# Altium PCB PCB_Radiance.PcbDoc (part 1 of 2)
Units mil, origin at the board's own origin, x right, y up, seen from the top; angles counter-clockwise.
Board outline 2362.21 x 2362.21 mil, 4 copper layers (Top Layer, GroundPlane, PowerPlane, Bottom Layer), stack 58.4 mil thick; 120 components, 82 nets, 399 pads, 18 vias.
Unrouted connection lines stored in the file: 128.
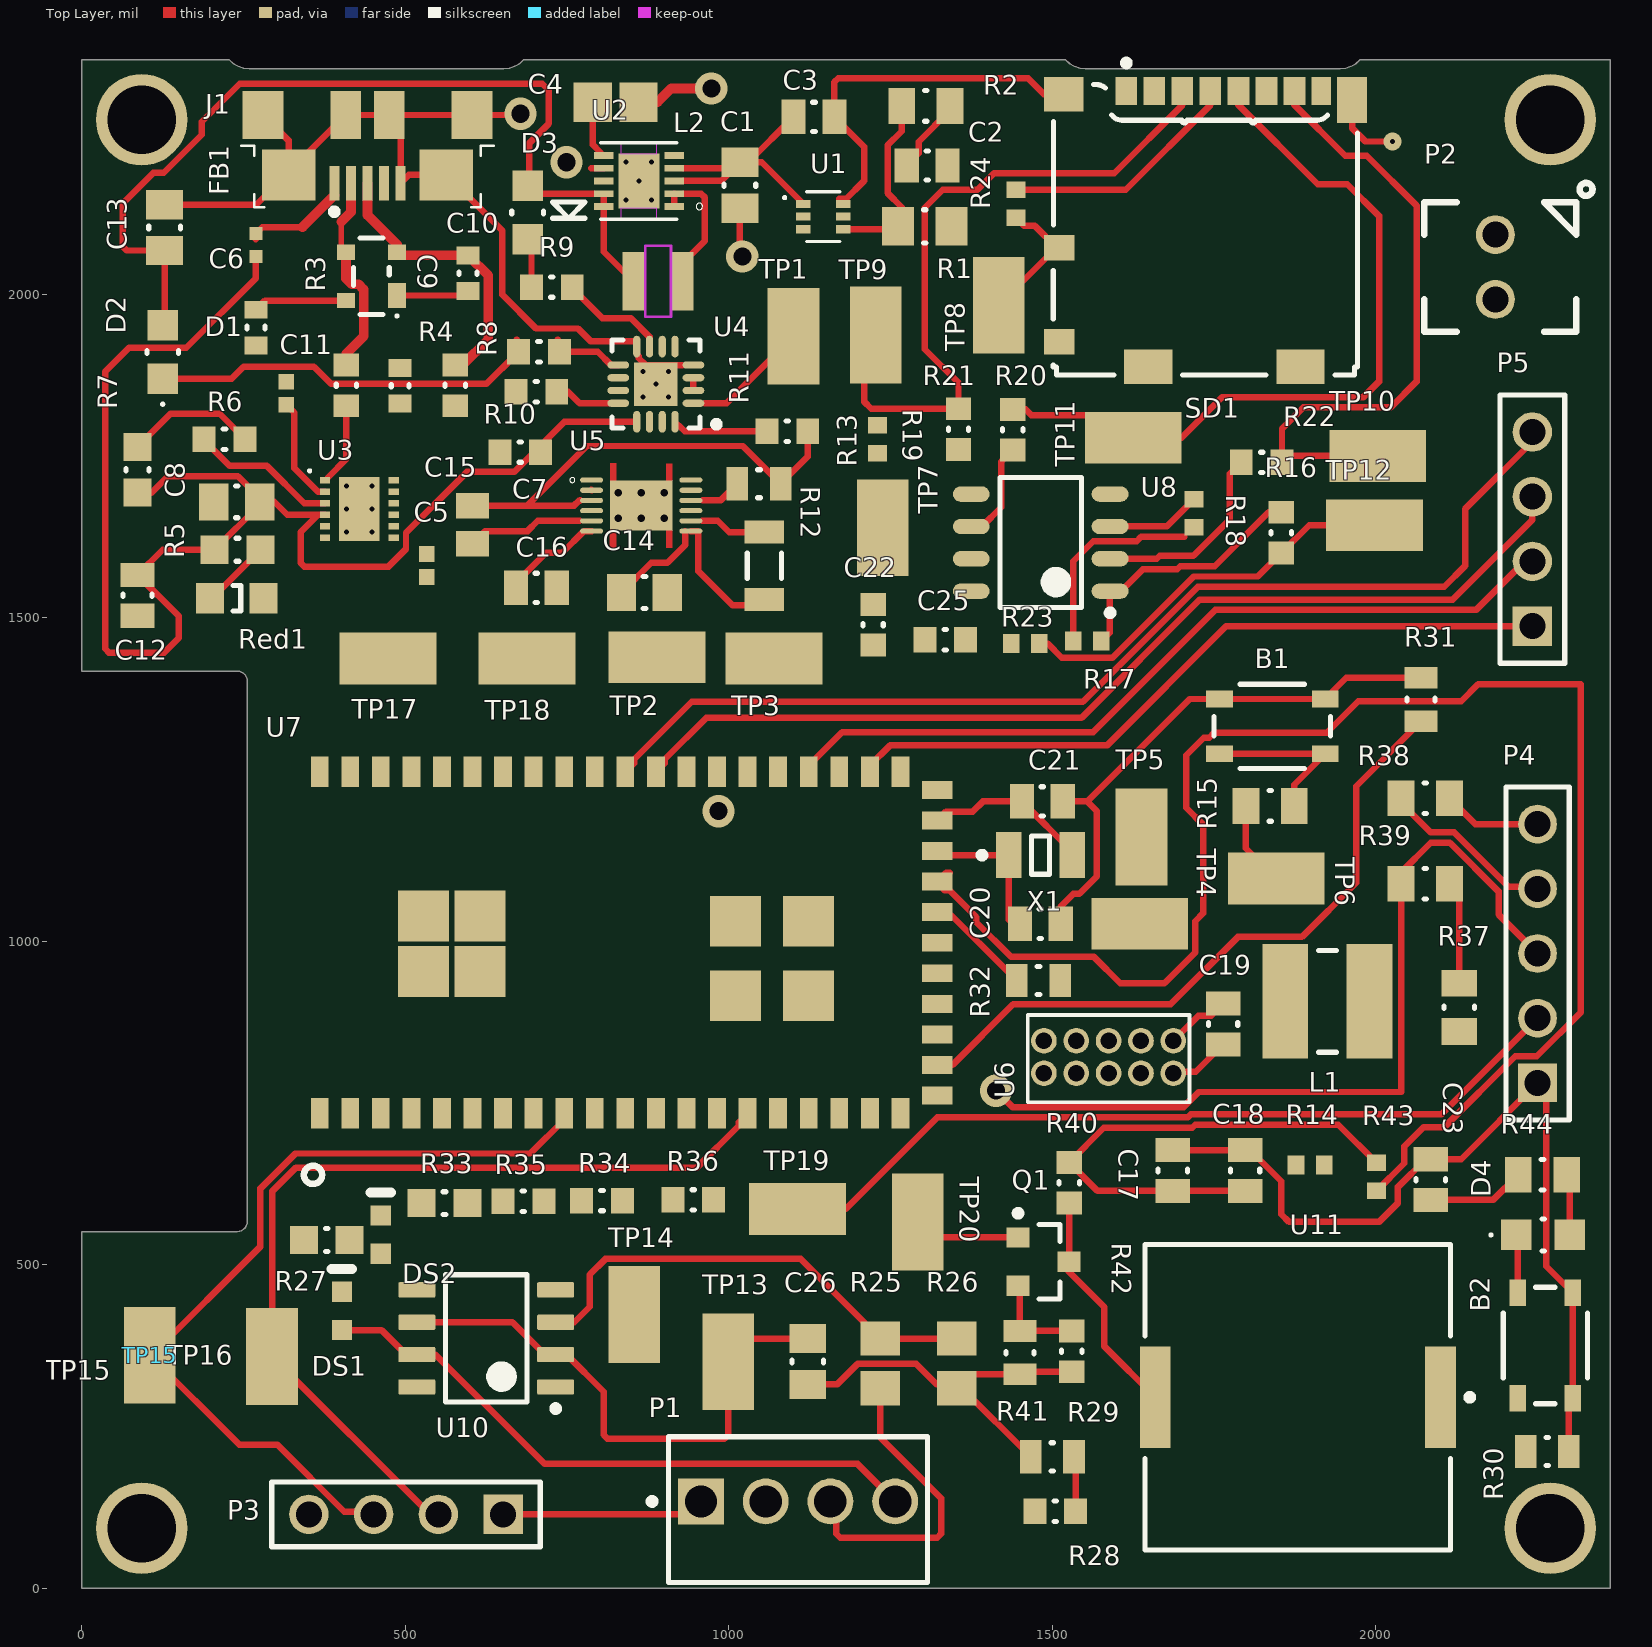
[diagram p0: Top Layer view]
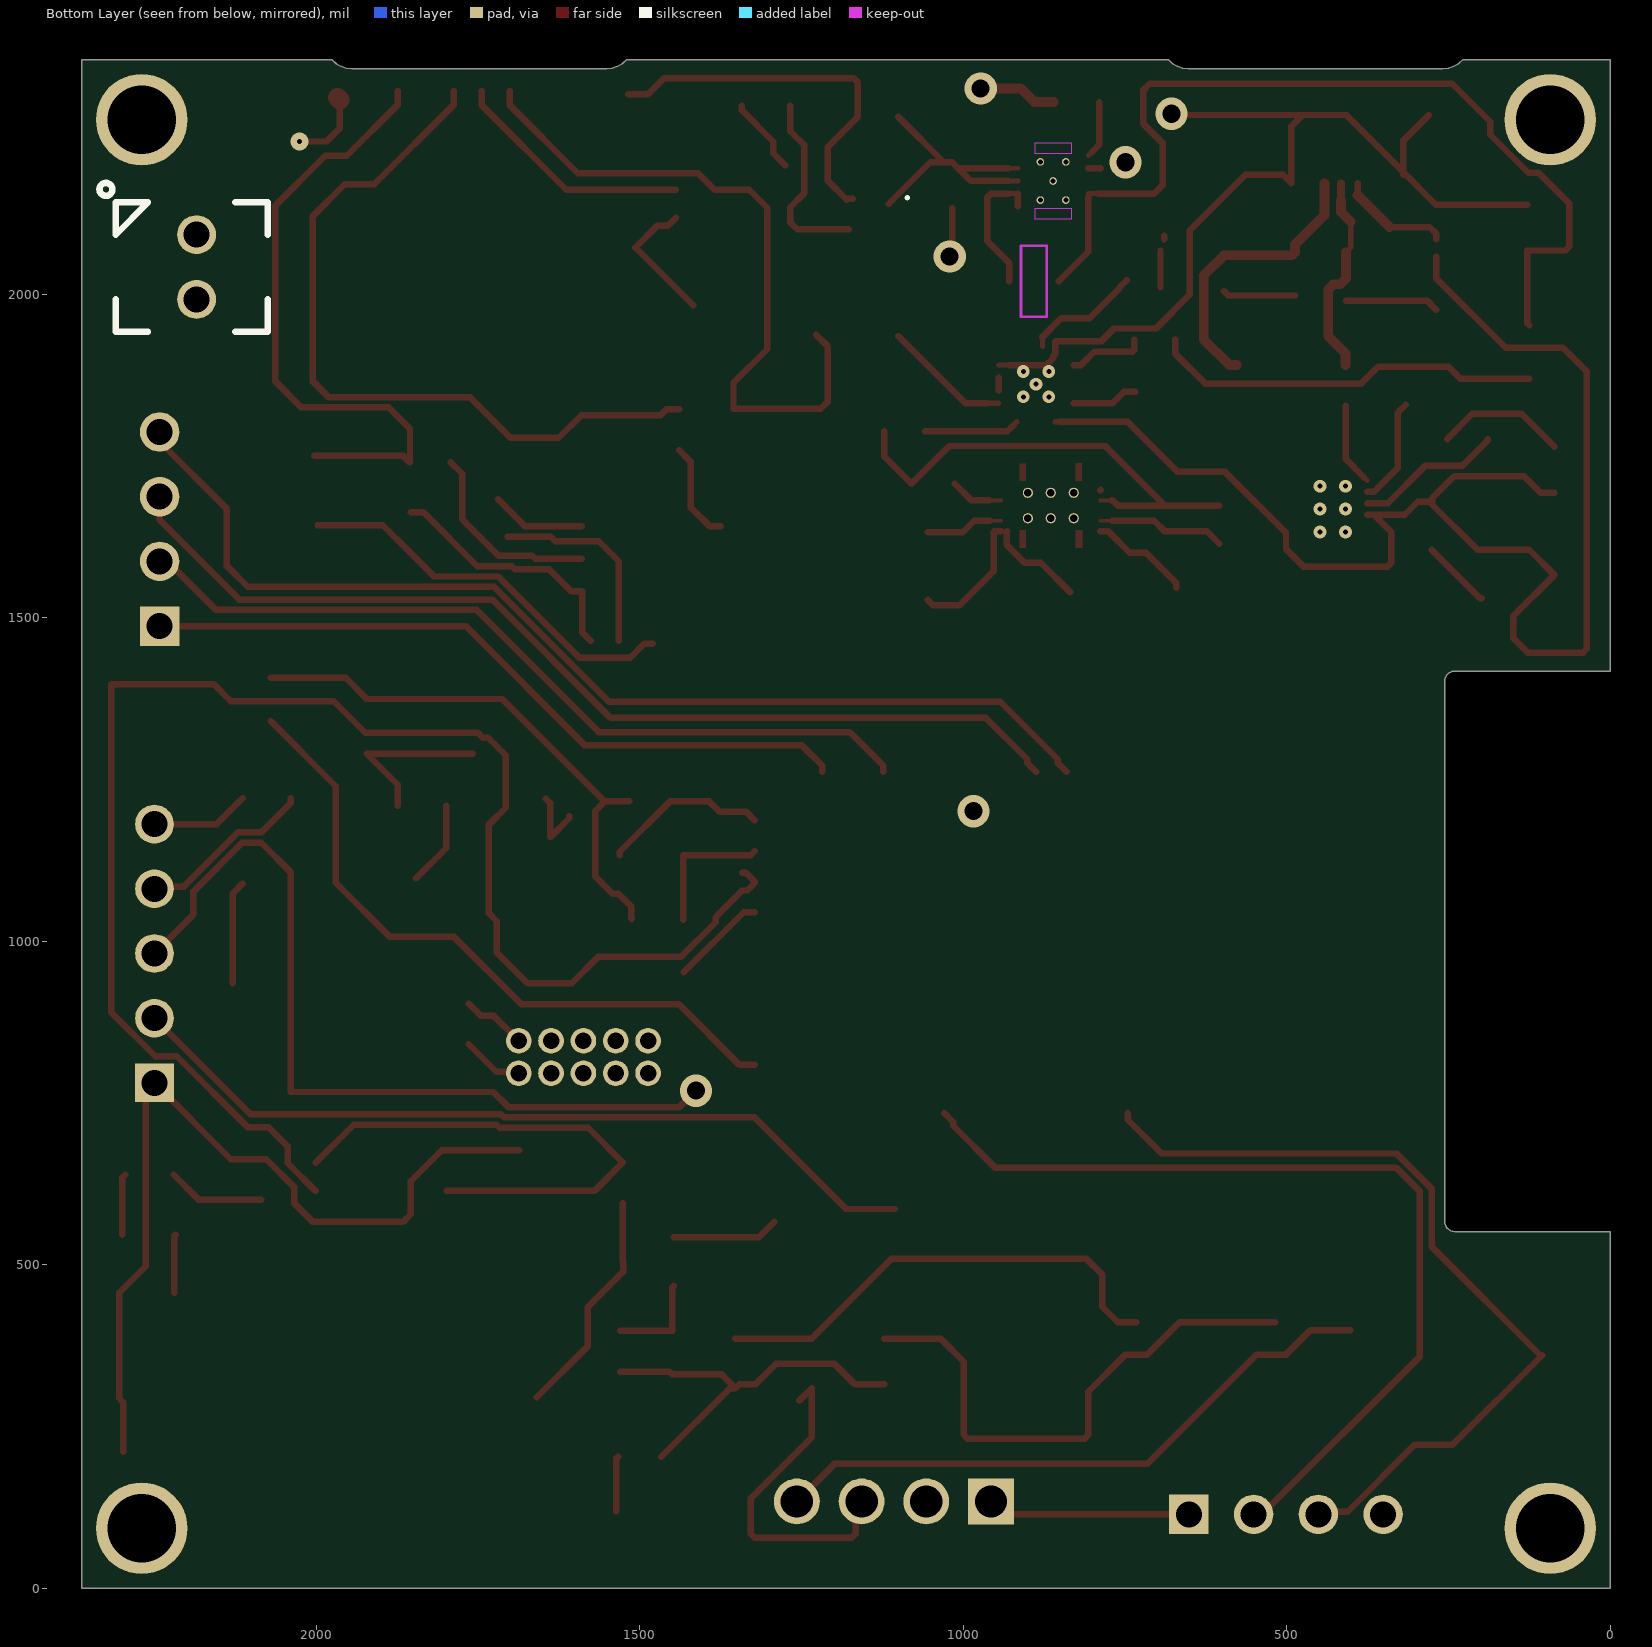
[diagram p1: Bottom Layer view, seen from below]

## Layer stack, top to bottom
Top Solder: solder mask 1, Solder Resist, Dk 3.5
Top Layer: signal copper 1.5
Dielectric1: prepreg 13, PP-006, Dk 4.1
GroundPlane: signal copper 0.7
Dielectric 2: core 28, Core-009, Dk 4.5
PowerPlane: signal copper 0.7
Dielectric 3: prepreg 13, PP-006, Dk 4.1
Bottom Layer: signal copper 1.5
Bottom Solder: solder mask 1, Solder Resist, Dk 3.5

## Board outline
240.16,551.18 0,551.18 0,0 2362.21,0 2362.2,2362.2 1975.39,2362.2 1969.06,2356.37 1961.63,2352.01 1953.45,2349.32 1944.88,2348.42 1551.18,2348.42 1542.62,2349.33 1534.45,2352.01 1527.02,2356.35 1520.67,2362.16 682.72,2362.2 676.38,2356.37 668.95,2352.01 660.77,2349.32 652.2,2348.42 258.5,2348.42 249.95,2349.33 241.77,2352.01 234.34,2356.35 227.99,2362.16 0,2362.2 0,1417.32 240.16,1417.32 243.66,1416.93 246.99,1415.77 249.98,1413.89 252.48,1411.4 254.35,1408.41 255.51,1405.08 255.91,1401.57 255.91,566.93 255.51,563.42 254.35,560.09 252.48,557.1 249.98,554.61 246.99,552.73 243.66,551.57

## Design rules (kind name [scope] priority, off if disabled: settings)
AcuteAngle [All] p1: minimum=6.00000000000000E+0001 checktracksonly=FALSE
AssemblyTestPointUsage [All] p1 off: allowmultiple=TRUE
AssemblyTestpoint [All] p1 off: testpointundercomponent=TRUE minsize=30 maxsize=100 preferedsize=60 minholesize=0 maxholesize=40 preferedholesize=32 testpointgrid=1 usegrid=FALSE gridtolerance=0.01 allowsidebottom=TRUE
BoardOutlineClearance "BoardOutlineClearance_Inner Layer" [OnLayer('Internal Plane 1')OR OnLayer('Internal Plane 2')] p1: gap=20 ignorepadtopadclearanceinfootprint=FALSE
BoardOutlineClearance BoardOutlineClearance_OuterLayers [All] p2: gap=10 ignorepadtopadclearanceinfootprint=FALSE except(20: SMDPad-OutlineEdge SMDPad-CavityEdge SMDPad-CutoutEdge THPad-OutlineEdge THPad-CavityEdge THPad-CutoutEdge)
Clearance [All] p1: gap=6 ignorepadtopadclearanceinfootprint=FALSE except(10: SMDPad-THPad)
DiffPairsRouting [All] p1: maxlimit=10 minlimit=10 mostfreqgap=10 toplayer_minwidth=6 toplayer_maxwidth=15 toplayer_prefwidth=15 midlayer1_minwidth=6 midlayer1_maxwidth=15 midlayer1_prefwidth=15 midlayer2_minwidth=6 midlayer2_maxwidth=15 midlayer2_prefwidth=15 bottomlayer_minwidth=6 bottomlayer_maxwidth=15 bottomlayer_prefwidth=15 maxuncoupledlength=500
FabricationTestPointUsage [All] p1 off: valid=0 allowmultiple=TRUE
FabricationTestpoint [All] p1 off: side=2 testpointundercomponent=TRUE minsize=30 maxsize=100 preferedsize=60 minholesize=0 maxholesize=40 preferedholesize=32 testpointgrid=1 allowsidebottom=TRUE usegrid=FALSE gridtolerance=0.01
HoleSize [All] p1: absolutevalues=TRUE maxlimit=100 minlimit=8 maxpercent=80.000 minpercent=20.000
MinimumAnnularRing [All] p1: minimumring=5
MinimumSolderMaskSliver [All] p1: minsoldermaskwidth=4
PlaneClearance [All] p1: clearance=10
PolygonConnect [All] p1: thpad.connectstyle=Relief thpad.reliefconductorwidth=10 thpad.reliefentries=4 thpad.polygonreliefangle="90 Angle" thpad.airgapwidth=10 smdpad.connectstyle=Relief smdpad.reliefconductorwidth=10 smdpad.reliefentries=4 smdpad.polygonreliefangle="90 Angle" smdpad.airgapwidth=10 via.connectstyle=Direct via.reliefconductorwidth=10 via.reliefentries=4 via.polygonreliefangle="90 Angle" via.airgapwidth=10
RoutingVias [All] p1: holewidth=8 width=20 viastyle="Through Hole" minholewidth=8 minwidth=20 maxholewidth=30 maxwidth=50
SMDNeckDown [All] p1: percent=75.000
SMDToCorner [All] p1: distance=0
SMDToPlane [All] p1: distance=0
SilkToSilkClearance [All] p1: silktosilkclearance=0
SilkToSolderMaskClearance [IsPad] p1: minsilkscreentomaskgap=2 clearancetoexposedcopper=TRUE
SolderMaskExpansion [All] p1: expansion=4
UnRoutedNet [All] p1: checkbadconnections=TRUE
ViasUnderSMD [All] p1: allowed=FALSE
Width [All] p1: maxlimit=1000 minlimit=6 preferedwidth=10
19 further rules are at their usual default settings.

## Classes and differential pairs
differential pair USB_DATA: +USB_DATA_P -USB_DATA_N

## Components (designator, comment, footprint, x,y, rotation, side; value= is the part's Value field where it differs from the comment)
B1 "PTS810 SJK 250 SMTR LFS" "PTS810 SJK 250 SMTR LFS" 1840,1332 r180 top
B2 "PTS810 SJK 250 SMTR LFS" "PTS810 SJK 250 SMTR LFS" 2262,375 r90 top
C1 "4.7uF 16V" CAPC0805(2012)145_N 1017,2168.43 r90 top value=4.7uF
C2 "CAP 22uF" CAPC0805(2012)100_L 1306.5,2199 r0 top value=22uF
C3 "CAP 10uF" CAPC0805(2012)145_L 1131.6,2274 r180 top value=10uF
C4 "120nF" CAPC2013X140X50ML20T25 825,2297 r0 top
C5 "100nF" CAPC0402(1005)60_N 533,1580.72 r90 top
C6 "10nF 16V" CAPC0603(1608)100_L 269,1948.44 r90 top value=10nF
C7 "100nF 16V" CAPC0603(1608)100_N 677.5,1756 r0 top value=100nF
C8 "4.7uF 16V" CAPC0805(2012)145_N 239.43,1679 r0 top value=4.7uF
C9 "47pF 16V" CAPC0603(1608)100_L 492,1858.44 r270 top value=47pF
C10 "47pF 16V" CAPC0603(1608)100_L 597,2032.44 r90 top value=47pF
C11 "100nF" CAPC0402(1005)60_N 316,1847 r270 top
C12 "CAP 1uF 16V 0805(2012)" CAPC0805(2012)100_L 86,1534.5 r90 top value=1uF
C13 "4.7uF 16V" CAPC0805(2012)145_N 128,2103 r270 top value=4.7uF
C14 "4.7uF 16V" CAPC0805(2012)145_N 869.57,1539 r180 top value=4.7uF
C15 "470pf 100V" CAPC2013X70X45LL10T25 604,1643.79 r270 top
C16 "CAP 1uF" CAPC0805(2012)100_L 702.5,1546 r180 top value=1uF
C17 "CAP 10uF 16V" CAPC0805(2012)145_L 1686,645.5 r270 top value=10uF
C18 "CAP 10uF 16V" CAPC0805(2012)145_L 1798,645.5 r270 top value=10uF
C19 "CAP 10uF 16V" CAPC0805(2012)145_L 1764,872 r90 top value=10uF
C20 "CAP 18pF 10V" CAPC0805(2012)75_L 1481.5,1027 r0 top value=18pF
C21 "CAP 18pF 10V" CAPC0805(2012)75_L 1484.5,1216 r0 top value=18pF
C22 "CAP 1uF 16V" CAPC0603(1608)100_N 1223,1489 r90 top value=1uF
C23 "CAP 10uF 16V" CAPC0805(2012)145_L 2085,631.5 r270 top value=10uF
C25 "100nF 16V" CAPC0603(1608)100_N 1334.5,1466 r180 top value=100nF
C26 "4.7uF 16V" CAPC0805(2012)145_N 1122,350.34 r90 top value=4.7uF
D1 "PRTR5V0U2X,215" NXP-SOT143B-4_V 447.63,2027.53 r180 top
D2 "" LTST-C170CKT_V 125,1910.66 r270 top
D3 "" LTST-C170GKT_V 689,2126.32 r270 top
D4 "" LTST-C170CKT_V 2258.66,546 r180 top
DS1 "LTST-C191KGKT" LITE-ON-LTST-C191KRKT-2_V 402,428.47 r90 top
DS2 "LTST-C191KGKT" LITE-ON-LTST-C191KRKT-2_V 462,546.47 r90 top
FB1 "BLM15AG100SN1D" MURA-BLM15-CHIP-2_V 269,2076 r270 top
J1 "ZX62R-B-5P" HIRO-ZX62R-B-5P_V 441.54,2224.34 r180 top
L1 "1uH" BOUR-SDR0403-2_V 1925.04,907 r0 top
L2 "1uH" "SMD 2510" 890.61,2020 r180 top
P1 "640456-4" TECO-640456-4 1107,134 r180 top
P2 "640456-2" 640456-2 2185,2042 r270 top
P3 "" SMTC-MTSW-104-07-X-S-170 651,114 r180 top
P4 "" SMTC-MTLW-105-05-X-S-190 2250,781 r90 top
P5 "" SMTC-MTSW-104-07-X-S-170 2242,1487 r90 top
Q1 "BC846ALT1G" ONSC-SOT-23-3-318-08_V 1486.37,504.6 r0 top
R1 "453K" RESC0805(2012)_M 1302.66,2105 r0 top value="453000.00 Ohm"
R2 "120K" RESC0805(2012)_N 1304.6,2291 r180 top value="120000.00 Ohm"
R3 "27R 1%" RESC0603(1608)_N 409,1859.03 r270 top value="27.00 Ohm"
R4 "27R 1%" RESC0603(1608)_N 577,1859.03 r270 top value="27.00 Ohm"
R5 "1K" RESC0603(1608)_M 240.57,1605 r180 top value="1000.00 Ohm"
R6 "Jumper" RESC0603(1608)_N 220.5,1776 r0 top value="0.00 Ohm"
R7 "1K" RESC0603(1608)_M 86,1728.57 r90 top value="1000.00 Ohm"
R8 "1K02" RESC0603(1608)_N 706.5,1911 r180 top value="1020.00 Ohm"
R9 "1K02" RESC0603(1608)_N 726.5,2011 r180 top value="1020.00 Ohm"
R10 "1K02" RESC0603(1608)_N 702.5,1849 r0 top value="1020.00 Ohm"
R11 "1K02" RESC0603(1608)_N 1090.5,1788 r180 top value="1020.00 Ohm"
R12 "10K2" RESC0805(2012)_L 1046.54,1707 r180 top value="10200.00 Ohm"
R13 "0.01" RESC3216X70X50LL05T20 1055,1580 r270 top
R14 "10K" RESC0402(1005)_M 1898.35,654 r180 top value="10000.00 Ohm"
R15 "39R" RESC0805(2012)_N 1836.6,1209 r0 top value="39.00 Ohm"
R16 "Jumper" RESC0603(1608)_N 1854,1631.5 r90 top value="0.00 Ohm"
R17 "10K" RESC0402(1005)_M 1554,1464 r0 top value="10000.00 Ohm"
R18 "10K" RESC0402(1005)_M 1719,1661.35 r90 top value="10000.00 Ohm"
R19 "10K" RESC0402(1005)_M 1230,1775.65 r90 top value="10000.00 Ohm"
R20 "Jumper" RESC0603(1608)_N 1439,1790.5 r270 top value="0.00 Ohm"
R21 "Jumper" RESC0603(1608)_N 1355,1791.5 r270 top value="0.00 Ohm"
R22 "Jumper" RESC0603(1608)_N 1823.5,1740 r180 top value="0.00 Ohm"
R23 "10K" RESC0402(1005)_M 1458.35,1460 r0 top value="10000.00 Ohm"
R24 "10K" RESC0402(1005)_M 1444,2140 r270 top value="10000.00 Ohm"
R25 "10K" RESC2013X70X40ML20T20 1234,347.39 r270 top
R26 "10K" RESC2013X70X40ML20T20 1352,347.39 r90 top
R27 "1K" RESC0603(1608)_M 378.57,538 r180 top value="1000.00 Ohm"
R28 "Jumper" RESC0603(1608)_N 1504.5,119 r180 top value="0.00 Ohm"
R29 "10K2" RESC0805(2012)_L 1500,203 r0 top value="10200.00 Ohm"
R30 "10K" RESC0805(2012)_L 2265,211 r180 top value="10200.00 Ohm"
R31 "10K" RESC0805(2012)_L 2070,1373.54 r90 top value="10200.00 Ohm"
R32 "10K" RESC0805(2012)_L 1478.54,939 r0 top value="10200.00 Ohm"
R33 "1K" RESC0603(1608)_M 560.43,595 r180 top value="1000.00 Ohm"
R34 "27R" RESC0603(1608)_N 804,599 r180 top value="27.00 Ohm"
R35 "27R" RESC0603(1608)_N 682.5,598 r0 top value="27.00 Ohm"
R36 "27R" RESC0603(1608)_N 945,600 r0 top value="27.00 Ohm"
R37 "5K49" RESC0805(2012)_N 2129,897.6 r270 top value="5490.00 Ohm"
R38 "5K49" RESC0805(2012)_N 2076.4,1221 r180 top value="5490.00 Ohm"
R39 "5K49" RESC0805(2012)_N 2076.4,1089 r180 top value="5490.00 Ohm"
R40 "1K02" RESC0603(1608)_N 1526,626.5 r90 top value="1020.00 Ohm"
R41 "220R" RESC0805(2012)_L 1450,364 r90 top value="220.00 Ohm"
R42 "Jumper" RESC0603(1608)_N 1530,366 r90 top value="0.00 Ohm"
R43 "10K" RESC0402(1005)_M 2001,635.65 r270 top value="10000.00 Ohm"
R44 "39R" RESC0805(2012)_N 2257.6,639 r0 top value="39.00 Ohm"
Red1 "150080SS75000" 0805_A 239.66,1530 r180 top
SD1 "104031-0811" MOLX-104031-0811_V 1737,2101 r180 top
TP1 "5019" KSTN-5019_V 1100,1935 r90 top
TP2 "5019" KSTN-5019_V 889,1439 r0 top
TP3 "5019" KSTN-5019_V 1070,1437 r0 top
TP4 "5019" KSTN-5019_V 1635,1027 r180 top
TP5 "5019" KSTN-5019_V 1638,1161 r90 top
TP6 "5019" KSTN-5019_V 1846,1097 r0 top
TP7 "5019" KSTN-5019_V 1238,1639 r90 top
TP8 "5019" KSTN-5019_V 1417,1983 r90 top
TP9 "5019" KSTN-5019_V 1227,1937 r90 top
TP10 "5019" KSTN-5019_V 2003,1750 r0 top
TP11 "5019" KSTN-5019_V 1625,1778 r180 top
TP12 "5019" KSTN-5019_V 1998,1643 r0 top
TP13 "5019" KSTN-5019_V 999,349.77 r270 top
TP14 "5019" KSTN-5019_V 853.79,423 r270 top
TP15 "5019" KSTN-5019_V 105,360 r90 top
TP16 "5019" KSTN-5019_V 294,358 r90 top
TP17 "5019" KSTN-5019_V 473,1437 r180 top
TP18 "5019" KSTN-5019_V 688,1437 r180 top
TP19 "5019" KSTN-5019_V 1106,586 r180 top
TP20 "5019" KSTN-5019_V 1292,566 r90 top
U1 "TLV626569ADRLR" *SOT50P160X60-6N 1146,2120 r0 top
U2 "TPS61232DRCT" *SON50P300X300X100-10N 861,2175 r180 top
U3 "FT234XD-R" DFN-12_V 428.85,1667.86 r0 top
U4 "BQ24075RGTRG4" RGT16-1700X1700TP 887.25,1861 r180 top
U5 "BQ27441DRZR-G1A" *SON40P400X250X100-13N 864.57,1673.31 r0 top
U6 "20021111-00010T4LF" 20021111-00010T4LF 1587,846 r0 top
U7 "SAMW25H18-MR510PB" SAMW25H18-MR510PB 844.75,997.78 r180 top
U8 "AT25DF081A-SSH-T" AT25DF081A-SSH-T 1482,1616 r180 top
U10 "OPA337UA/2K5" D0008A_N 625,386 r180 top
U11 "PKLCS1212E4001-R1" MURA-PKLCS1212E4001-R1-2_V 1879.53,295 r180 top
X1 "14340272-32.768KHz" ITTI-14340272-32.768KHz-2_V 1481.79,1133 r0 top

## Footprints (in the part's own frame and the unit in brackets; to place one, negate y for a bottom-side part, rotate by r counter-clockwise, add the part's x,y. Pads: shape width x height; smd on the part's side, far side on the other; paste and mask are expansions set on the pad)
0805_A [mm] "Chip LED, 2-Leads, Body 2.0x1.3mm, IPC Medium Density"
  rect 1.1x1.2 smd: 1(-1.05,0) 2(1.05,0)
  silkscreen extent -0.15,-0.5 0.15,0.5, body extent -1,-0.62 1,0.63, height 0.68
640456-2 [mil] "CONN HEADER VERT 2POS .100 TIN"
  round 60 hole 40.16: 1(-50,0) 2(50,0)
  silkscreen extent -130,-110 100,150, body extent -100,-107 100,123, height 395
20021111-00010T4LF [mil] "CONN HEADER 10POS UNSHD VERT T/H"
  round 39.6 hole 25.6: 1(-100,-50) 2(-100,0) 3(-50,-50) 4(-50,0) 5(0,-50) 6(0,0) 7(50,-50) 8(50,0) 9(100,-50) 10(100,0)
  silkscreen extent -125,-95 125,40, body extent -125,-92 125,42, height 217
*SON40P400X250X100-13N [mm]
  oval 0.9x0.2 smd: 1(-1.95,1) 2(-1.95,0.6) 3(-1.95,0.2) 4(-1.95,-0.2) 5(-1.95,-0.6) 6(-1.95,-1) 7(1.95,-1) 8(1.95,-0.6) 9(1.95,-0.2) 10(1.95,0.2) 11(1.95,0.6) 12(1.95,1)
  rect 2.45x1.95 smd: 13(0,0)
  round 0.4 hole 0.3: 14(0.9,0.5) 15(0,0.5) 16(-0.9,0.5) 17(-0.9,-0.5) 18(0,-0.5) 19(0.9,-0.5)
  Top Layer region: -0.978,1.653 -0.978,0.97 -1.225,0.97 -1.225,1.653
  Top Layer region: -0.975,-0.97 -0.975,-1.653 -1.228,-1.653 -1.228,-0.97
  Top Layer region: 1.226,-0.971 1.226,-1.65 0.975,-1.65 0.975,-0.971
  Top Layer region: 1.225,1.65 1.225,0.975 0.975,0.975 0.975,1.65
  silkscreen extent -2.8,0.9 -2.6,1.1
*SON50P300X300X100-10N [mm]
  rect 0.76x0.26 smd: 1(-1.385,1) 2(-1.385,0.5) 3(-1.385,0) 4(-1.385,-0.5) 5(-1.385,-1) 6(1.385,-1) 7(1.385,-0.5) 8(1.385,0) 9(1.385,0.5) 10(1.385,1)
  rect 1.6x2.15 smd: 11(0,0)
  round 0.3 hole 0.2: P$1(0,0) P$2(0.5,0.75) P$3(-0.5,0.75) P$4(-0.5,-0.75) P$5(0.5,-0.75)
  Keep-Out Layer region: -0.705,1.075 0.705,1.075 0.705,1.505 -0.705,1.505
  Keep-Out Layer region: -0.705,-1.505 0.705,-1.505 0.705,-1.075 -0.705,-1.075
  Keep-Out Layer region: -0.705,1.075 0.705,1.075 0.705,1.505 -0.705,1.505
  Keep-Out Layer region: -0.705,-1.505 0.705,-1.505 0.705,-1.075 -0.705,-1.075
  Keep-Out Layer region: -0.705,1.075 0.705,1.075 0.705,1.505 -0.705,1.505
  Keep-Out Layer region: -0.705,-1.505 0.705,-1.505 0.705,-1.075 -0.705,-1.075
  silkscreen extent -2.5,-1.5 1.5,1.5
*SOT50P160X60-6N [mm]
  rect 0.56x0.32 smd: 1(-0.785,0.5) 2(-0.785,0) 3(-0.785,-0.5) 4(0.785,-0.5) 5(0.785,0) 6(0.785,0.5)
  silkscreen extent -1.57,-0.97 0.65,0.97
AT25DF081A-SSH-T [mm] "IC FLASH 8MBIT 100MHZ 8SOIC"
  oval 1.45x0.6 smd: 1(-2.725,1.905) 2(-2.725,0.635) 3(-2.725,-0.635) 4(-2.725,-1.905) 5(2.725,-1.905) 6(2.725,-0.635) 7(2.725,0.635) 8(2.725,1.905)
  silkscreen extent -2.85,-2.55 1.6,2.88, body extent -3,-2.55 3,2.55, height 1.75
BOUR-SDR0403-2_V [mm] "SMD, 2-Leads, Dia 4.5mm, Height 3.5mm"
  rect 1.8x4.5 smd: 1(-1.65,0) 2(1.65,0)
  silkscreen extent -0.35,-2 0.35,2, body extent -2.25,-2 2.25,2, height 3.5
CAPC0402(1005)60_N [mm] "Chip Capacitor, Body 1.0x0.5mm, Height 0.6mm, IPC Medium Density"
  rect 0.62x0.62 smd: 1(-0.45,0) 2(0.45,0)
  body extent -0.55,-0.3 0.55,0.3, height 0.6
CAPC0603(1608)100_L [mm] "Chip Capacitor, Body 1.6x0.8mm, Height 1.0mm, IPC High Density"
  rect 0.7x0.9 smd: 1(-0.7,0) 2(0.7,0)
  silkscreen extent -0.05,-0.35 0.05,0.35, body extent -0.87,-0.47 0.88,0.48, height 1
CAPC0603(1608)100_N [mm] "Chip Capacitor, Body 1.6x0.8mm, Height 1.0mm, IPC Medium Density"
  rect 0.9x1 smd: 1(-0.8,0) 2(0.8,0)
  silkscreen extent -0.05,-0.4 0.05,0.4, body extent -0.87,-0.48 0.88,0.47, height 1
CAPC0805(2012)75_L [mm] "Chip Capacitor, Body 2.0x1.2mm, Height 0.75mm, IPC High Density"
  rect 0.95x1.35 smd: 1(-0.8,0) 2(0.8,0)
  silkscreen extent -0.05,-0.58 0.05,0.58, body extent -1.1,-0.72 1.1,0.72, height 0.75
CAPC0805(2012)100_L [mm] "Chip Capacitor, Body 2.0x1.2mm, Height 1.0mm, IPC High Density"
  rect 0.95x1.35 smd: 1(-0.8,0) 2(0.8,0)
  silkscreen extent -0.05,-0.58 0.05,0.58, body extent -1.1,-0.72 1.1,0.72, height 1
CAPC0805(2012)145_L [mm] "Chip Capacitor, Body 2.0x1.2mm, Height 1.45mm, IPC High Density"
  rect 0.95x1.35 smd: 1(-0.8,0) 2(0.8,0)
  silkscreen extent -0.05,-0.58 0.05,0.58, body extent -1.1,-0.72 1.1,0.72, height 1.45
CAPC0805(2012)145_N [mm] "Chip Capacitor, Body 2.0x1.2mm, Height 1.45mm, IPC Medium Density"
  rect 1.15x1.45 smd: 1(-0.9,0) 2(0.9,0)
  silkscreen extent -0.05,-0.62 0.05,0.63, body extent -1.1,-0.72 1.1,0.73, height 1.45
CAPC2013X70X45LL10T25 [mm] "Chip Capacitor, 2-Leads, Body 2.00x1.25mm, IPC High Density"
  rect 1x1.3 smd: 1(-0.75,0) 2(0.75,0)
  body extent -1.05,-0.67 1.05,0.68, height 0.7
CAPC2013X140X50ML20T25 [mm] "Chip Capacitor, 2-Leads, Body 2.00x1.25mm, IPC Low Density"
  rect 1.5x1.55 smd: 1(-0.9,0) 2(0.9,0)
  body extent -1.1,-0.72 1.1,0.72, height 1.4
D0008A_N [mm] "SOIC, 8-Leads, Body 5x4mm, Pitch 1.27mm, IPC Medium Density"
  rrect17% 1.45x0.6 smd: 1(-2.725,1.905) 2(-2.725,0.635) 3(-2.725,-0.635) 4(-2.725,-1.905) 5(2.725,-1.905) 6(2.725,-0.635) 7(2.725,0.635) 8(2.725,1.905)
  silkscreen extent -2.85,-2.5 1.6,2.88, body extent -3,-2.45 3,2.45, height 1.63
DFN-12_V [mm] "SON, 12-Leads, Body 3x3mm, Pitch 0.45mm, Thermal Pad 2.5x1.6mm"
  rect 0.4x0.25 smd: 1(-1.35,1.125) 2(-1.35,0.675) 3(-1.35,0.225) 4(-1.35,-0.225) 5(-1.35,-0.675) 6(-1.35,-1.125) 7(1.35,-1.125) 8(1.35,-0.675) 9(1.35,-0.225) 10(1.35,0.225) 11(1.35,0.675) 12(1.35,1.125)
  rect 1.6x2.5 smd mask+0.102: 13(0,0)
  silkscreen extent -2,1.45 -1.9,1.55, body extent -1.5,-1.5 1.5,1.5, height 0.9
HIRO-ZX62R-B-5P_V [mm] "USB Micro-B R/A Connector"
  rect 0.4x1.35 smd: 1(1.3,1.338) 2(0.65,1.338) 3(0,1.338) 4(-0.65,1.338) 5(-1.3,1.338)
  rect 2.1x2 smd: 6(-3.1,1.012) 11(3.1,1.012)
  rect 1.6x1.9 smd: 7(-4.1,-1.338) 10(4.1,-1.338)
  rect 1.2x1.9 smd: 8(-0.85,-1.338) 9(0.85,-1.338)
  silkscreen extent -4.95,-0.13 4.95,2.58, body extent -4.4,-3.95 4.4,1.78, height 2.71
ITTI-14340272-32.768KHz-2_V [mm] "Hand Drawn, 2-Leads, Body 3.2x1.5mm, Pitch 2.5mm"
  rect 1x1.8 smd: 1(-1.25,0) 2(1.25,0)
  silkscreen extent -2.42,-0.75 0.35,0.75, body extent -1.6,-0.75 1.6,0.75, height 0.9
KSTN-5019_V [mm] "Test Point, 1-Leads, Body 3.81x2.03mm"
  rect 3.8x2.03 smd: 1(0,0)
  body extent -1.9,-1.01 1.9,1.02, height 2.29
LITE-ON-LTST-C191KRKT-2_V [mm] "Chip, 2-Leads, Body 1.6x0.8mm"
  rect 0.8x0.8 smd: 1(-0.75,0) 2(0.75,0)
  silkscreen extent 1.65,-0.4 1.65,0.4, body extent -0.8,-0.4 0.8,0.4, height 0.55
LTST-C170CKT_V [mm]
  rect 1.2x1.2 smd: A(-1.05,0) C(1.05,0)
  silkscreen extent -0.05,-0.63 2.1,0.63, body extent -1,-0.63 1,0.63, height 1.1
LTST-C170GKT_V [mm] "SMD, 2-Leads, Body 2x1.25mm"
  rect 1.2x1.2 smd: 1(-1.05,0) 2(1.05,0)
  silkscreen extent -0.41,-0.63 0.23,2.25, body extent -1,-0.63 1,0.63, height 1.1
MOLX-104031-0811_V [mm] "Micro SD, 8-Leads, Body 11.95x11.4mm, Pitch 1.1mm"
  rect 0.85x1.1 smd: 1(3.113,-5.412) 2(2.013,-5.412) 3(0.913,-5.412) 4(-0.188,-5.412) 5(-1.288,-5.412) 6(-2.387,-5.412) 7(-3.487,-5.412)
  rect 0.75x1.1 smd: 8(-4.537,-5.412)
  rect 1.2x1 smd: 9(5.748,0.738) 10(5.748,4.438)
  rect 1.55x1.35 smd: 11(5.573,-5.287)
  rect 1.17x1.8 smd: 12(-5.747,-5.062)
  rect 1.9x1.35 smd: 13(-3.722,5.413) 14(2.248,5.413)
  silkscreen extent -5.97,-6.64 5.98,5.74, body extent -5.97,-5.66 5.98,5.74, height 1.45
MURA-BLM15-CHIP-2_V [mm] "Chip Ferrite Bead, 2-Leads, Body 1x0.5mm"
  rect 0.5x0.5 smd: 1(-0.45,0) 2(0.45,0)
  body extent -0.52,-0.28 0.53,0.28, height 0.55
MURA-PKLCS1212E4001-R1-2_V [mm] "SMD, 2-Leads, Body 12x12mm"
  rect 1.2x4 smd: 1(-5.6,0) 2(5.6,0)
  silkscreen extent -6.88,-6 6,6, body extent -6,-6 6,6, height 3
NXP-SOT143B-4_V [mm] "SOT143, 4-Leads, Body 3x1.4mm"
  rect 0.7x1 smd: 1(-1,0.75)
  rect 0.7x0.6 smd: 2(-1,-0.95) 3(1,-0.95) 4(1,0.95)
  silkscreen extent -1.05,-1.5 0.7,1.6, body extent -0.7,-1.5 0.7,1.5, height 1.1
ONSC-SOT-23-3-318-08_V [mm] "SOT23, 3-Leads, Body 2.92x1.3mm, Pitch 0.95mm"
  rect 0.9x0.8 smd: 1(-1,0.95) 2(-1,-0.95) 3(1,0)
  silkscreen extent -1.12,-1.46 0.65,2.02, body extent -0.65,-1.46 0.65,1.46, height 1.11
"PTS810 SJK 250 SMTR LFS" [mm] "SWITCH TACTILE SPST-NO 0.05A 16V"
  rect 1.05x0.65 smd: 1(-2.075,1.075) 2(2.075,1.075) 3(-2.075,-1.075) 4(2.075,-1.075)
  silkscreen extent -2.29,-1.65 2.29,1.65, body extent -2.3,-1.6 2.3,1.6, height 2.5
RESC0402(1005)_M [mm] "Chip Resistor, Body 1.0x0.5mm, IPC Low Density"
  rect 0.65x0.75 smd: 1(-0.55,0) 2(0.55,0)
  body extent -0.52,-0.28 0.53,0.28, height 0.4
RESC0603(1608)_M [mm] "Chip Resistor, Body 1.6x0.8mm, IPC Low Density"
  rect 1.1x1.1 smd: 1(-0.9,0) 2(0.9,0)
  silkscreen extent -0.05,-0.45 0.05,0.45, body extent -0.85,-0.47 0.85,0.47, height 0.6
RESC0603(1608)_N [mm] "Chip Resistor, Body 1.6x0.8mm, IPC Medium Density"
  rect 0.9x1 smd: 1(-0.8,0) 2(0.8,0)
  silkscreen extent -0.05,-0.4 0.05,0.4, body extent -0.85,-0.47 0.85,0.47, height 0.6
RESC0805(2012)_L [mm] "Chip Resistor, Body 2.0x1.3mm, IPC High Density"
  rect 0.85x1.3 smd: 1(-0.85,0) 2(0.85,0)
  silkscreen extent -0.05,-0.55 0.05,0.55, body extent -1.1,-0.67 1.1,0.68, height 0.7
RESC0805(2012)_M [mm] "Chip Resistor, Body 2.0x1.3mm, IPC Low Density"
  rect 1.25x1.5 smd: 1(-1.05,0) 2(1.05,0)
  silkscreen extent -0.05,-0.65 0.05,0.65, body extent -1.1,-0.67 1.1,0.67, height 0.7
RESC0805(2012)_N [mm] "Chip Resistor, Body 2.0x1.3mm, IPC Medium Density"
  rect 1.05x1.4 smd: 1(-0.95,0) 2(0.95,0)
  silkscreen extent -0.05,-0.6 0.05,0.6, body extent -1.1,-0.67 1.1,0.68, height 0.7
RESC2013X70X40ML20T20 [mm] "Chip Resistor, 2-Leads, Body 2.00x1.25mm, IPC Low Density"
  rect 1.35x1.55 smd: 1(-0.975,0) 2(0.975,0)
  body extent -1.1,-0.72 1.1,0.72, height 0.7
RESC3216X70X50LL05T20 [mm] "Chip Resistor, 2-Leads, Body 3.20x1.60mm, IPC High Density"
  rect 0.9x1.55 smd: 1(-1.325,0) 2(1.325,0)
  silkscreen extent -0.5,-0.67 0.5,0.67, body extent -1.63,-0.82 1.62,0.82, height 0.7
RGT16-1700X1700TP [mm] "QFN, 16-Leads, Body 3x3mm, Pitch 0.5mm, Thermal Pad 1.7x1.7mm, TI Recommended"
  oval 0.85x0.28 smd paste-0.025 mask+0.07: 1(-1.475,0.75) 2(-1.475,0.25) 3(-1.475,-0.25) 4(-1.475,-0.75) 9(1.475,-0.75) 10(1.475,-0.25) 11(1.475,0.25) 12(1.475,0.75)
  oval 0.28x0.85 smd paste-0.025 mask+0.07: 5(-0.75,-1.475) 6(-0.25,-1.475) 7(0.25,-1.475) 8(0.75,-1.475) 13(0.75,1.475) 14(0.25,1.475) 15(-0.25,1.475) 16(-0.75,1.475)
  rect 1.7x1.7 smd paste-0.85 mask+0.07: 17(0,0)
  silkscreen extent -2.5,-1.73 1.73,1.73, body extent -1.57,-1.57 1.58,1.58, height 1
SAMW25H18-MR510PB [mm] "RF TXRX MODULE WIFI TRACE ANT"
  rect 2x2 smd: 0(-7.065,-0.839) 0(-7.065,2.085) 0(-4.21,-0.839) 0(-4.21,2.085) 0(5.828,-1.045) 0(5.828,1.137) 0(8.046,-1.045) 0(8.046,1.137)
  rect 0.7x1.2 smd: 1(12.121,6.7) 2(10.921,6.7) 3(9.721,6.7) 4(8.521,6.7) 5(7.321,6.7) 6(6.121,6.7) 7(4.921,6.7) 8(3.721,6.7) 9(2.521,6.7) 10(1.321,6.7) 11(0.121,6.7) 12(-1.079,6.7) 13(-2.279,6.7) 14(-3.479,6.7) 15(-4.679,6.7) 16(-5.879,6.7) 17(-7.079,6.7) 18(-8.279,6.7) 19(-9.479,6.7) 20(-10.679,6.7) 32(-10.679,-6.7) 33(-9.479,-6.7) 34(-8.279,-6.7) 35(-7.079,-6.7) 36(-5.879,-6.7) 37(-4.679,-6.7) 38(-3.479,-6.7) 39(-2.279,-6.7) 40(-1.079,-6.7) 41(0.121,-6.7) 42(1.321,-6.7) 43(2.521,-6.7) 44(3.721,-6.7) 45(4.921,-6.7) 46(6.121,-6.7) 47(7.321,-6.7) 48(8.521,-6.7) 49(9.721,-6.7) 50(10.921,-6.7) 51(12.121,-6.7)
  rect 1.2x0.7 smd: 21(-12.12,6.004) 22(-12.12,4.804) 23(-12.12,3.604) 24(-12.12,2.404) 25(-12.12,1.204) 26(-12.12,0.004) 27(-12.12,-1.196) 28(-12.12,-2.396) 29(-12.12,-3.596) 30(-12.12,-4.796) 31(-12.12,-5.996)
  silkscreen extent 12.02,8.76 12.74,9.48, body extent -12.89,-7.45 20.98,7.46, height 3.37
"SMD 2510" [mm] "Chip Inductor, 2-Leads, Body 2.5x2.0mm, IPC Medium Density"
  rect 0.85x2.3 smd: 1(-0.975,0) 2(0.975,0)
  Keep-Out Layer lines w0.1: 0.508,1.397 0.508,-1.397 -0.508,-1.397 -0.508,1.397 0.508,1.397
  body extent -1.25,-1 1.25,1, height 1
SMTC-MTLW-105-05-X-S-190 [mm] "Terminal Assembly, 1x5 Pins, Vertical, 2.54mm Pitch, Male"
  rect 1.52x1.52 hole 1.02: 1(0,0)
  round 1.52 hole 1.02: 2(2.54,0) 3(5.08,0) 4(7.62,0) 5(10.16,0)
  silkscreen extent -1.46,-1.24 11.62,1.24, body extent -1.27,-1.24 11.43,1.24, height 6.35
SMTC-MTSW-104-07-X-S-170 [mm] "Assembly .025\" [.64] SQ Post Terminal Strip, 1x4 Pins, Vertical, 2.54mm Pitch, Male"
  rect 1.55x1.55 hole 1.02: 1(0,0)
  round 1.55 hole 1.02: 2(2.54,0) 3(5.08,0) 4(7.62,0)
  silkscreen extent -1.46,-1.27 9.08,1.27, body extent -1.27,-1.27 8.89,1.27, height 6.86
TECO-640456-4 [mm] "Through Hole, 4-Leads, Body 10.16x5.72mm, Pitch 2.54mm"
  rect 1.8x1.8 hole 1.27 paste+0: 1(3.81,0)
  round 1.8 hole 1.27 paste+0: 2(1.27,0) 3(-1.27,0) 4(-3.81,0)
  silkscreen extent -5.08,-2.54 5.86,3.18, body extent -5.08,-2.54 5.08,3.18, height 10.03

## Part data
B1 B2: "SWITCH TACTILE SPST-NO 0.05A 16V Tactile Switch SPST-NO Top Actuated Surface Mount", Color=White, Current Rating="50 mA", Manufacturer="ITT /  C&K Components", Manufacturer Part Number=PTS810SJK250SMTRLFS, Operating Force="2.6 N", Operating Temperature Range="- 40 C to + 85 C", Supplier Part Number 1=CKN10503CT-ND, Voltage Rating DC="16 VDC", Actuator=Oval, Brand="C&K Components", ComponentLink1Description=https://datasheet.ciiva.com/18514/pts810-4mar13-18514061.pdf, ComponentLink1URL=https://datasheet.ciiva.com/18514/pts810-4mar13-18514061.pdf, ComponentLink2Description=https://datasheet.ciiva.com/18514/pts810-4mar13-18514062.pdf, ComponentLink2URL=https://datasheet.ciiva.com/18514/pts810-4mar13-18514062.pdf, ComponentLink3Description=https://datasheet.ciiva.com/18514/pts810-4mar13-18514063.pdf, ComponentLink3URL=https://datasheet.ciiva.com/18514/pts810-4mar13-18514063.pdf, Contact Form=SPST, Contact Plating=Silver, Factory Pack Quantity=2900, Mounting Direction=Straight, Mounting Style=SMD/SMT, Packaging=Reel, Part # Aliases=Y97LT25B5DBFP, Product Category="Tactile Switches", RoHS=Details, Series=PTS810, Stem Height="2.5 mm", Supplier 1=Digi-Key, Switch Function="OFF - (ON)", Termination Style="J Form Lead", Travel="0.15 mm"
C1 C8 C13 C14 C26: library part CMP-1036-04889-1, "CAP 4.7uF 16V ±10% 0805 (2012 Metric) Thickness 1.45mm SMD", Case-EIA=0805, Case-Metric=2012, Rated Voltage="16 V", Tolerance=±10%, Max Thickness="1.45 mm", Technology=SMT
C2: library part CMP-1036-04944-1, "CAP 22uF 10V ±20% 0805 (2012 Metric) Thickness 1mm SMD", Case-EIA=0805, Case-Metric=2012, Rated Voltage="10 V", Tolerance=±20%, Max Thickness="1 mm", Technology=SMT
C3 C17 C18 C19 C23: library part CMP-1036-04927-1, "CAP 10uF 16V ±10% 0805 (2012 Metric) Thickness 1.45mm SMD", Case-EIA=0805, Case-Metric=2012, Rated Voltage="16 V", Tolerance=±10%, Max Thickness="1.45 mm", Technology=SMT
C4: library part CMP-2007-04709-1, Manufacturer="AVX Interconnect / Elco", Part Number=08055C124KAT2A
C5 C11: library part CMP-1034-02062-1, "CAP 100nF 6.3V ±20% 0402 (1005 Metric) Thickness 0.6mm SMD", Case-EIA=0402, Case-Metric=1005, Rated Voltage="6.3 V", Tolerance=±20%, Max Thickness="0.6 mm", Technology=SMT
C6: library part CMP-1035-02311-1, "CAP 10nF 16V ±10% 0603 (1608 Metric) Thickness 1mm SMD", Case-EIA=0603, Case-Metric=1608, Rated Voltage="16 V", Tolerance=±10%, Max Thickness="1 mm", Technology=SMT
C7 C25: library part CMP-1035-02584-1, "CAP 100nF 16V ±10% 0603 (1608 Metric) Thickness 1mm SMD", Case-EIA=0603, Case-Metric=1608, Rated Voltage="16 V", Tolerance=±10%, Max Thickness="1 mm", Technology=SMT
C9 C10: library part CMP-1035-01048-1, "CAP 47pF 16V ±0.5pF 0603 (1608 Metric) Thickness 1mm SMD", Case-EIA=0603, Case-Metric=1608, Rated Voltage="16 V", Tolerance=±0.5pF, Max Thickness="1 mm", Technology=SMT
C12 C16: library part CMP-1036-04749-1, "CAP 1uF 16V ±20% 0805 (2012 Metric) Thickness 1mm SMD", Case-EIA=0805, Case-Metric=2012, Rated Voltage="16 V", Tolerance=±20%, Max Thickness="1 mm", Technology=SMT
C15: library part CMP-2007-00930-1, Manufacturer=Murata, Part Number=GRM2165C2A471JA01D
C20 C21: library part CMP-1036-01106-1, "CAP 18pF 10V ±1% 0805 (2012 Metric) Thickness 0.75mm SMD", Case-EIA=0805, Case-Metric=2012, Rated Voltage="10 V", Tolerance=±1%, Max Thickness="0.75 mm", Technology=SMT
C22: library part CMP-1035-02737-1, "CAP 1uF 16V ±10% 0603 (1608 Metric) Thickness 1mm SMD", Case-EIA=0603, Case-Metric=1608, Rated Voltage="16 V", Tolerance=±10%, Max Thickness="1 mm", Technology=SMT
D1: library part CMP-2000-05285-1, "Ultra Low Capacitance Double Rail-to-Rail ESD Protection Diode, 5.5 V, 1 pF, -40 to 85 degC, 4-Pin SOT143B, RoHS, Tape and Reel", Capacitance Value=16pF, ESD Protection Voltage=8KV@ContactDisc, Leakage Current=0.1uA, Manufacturer="NXP Semiconductors", Operating Temperature Classification=Industrial, Operating Temperature Max Deg. C=85C, Operating Temperature Min Deg. C=-40C, Operating Temp Range=-40Cto85C, Package / Case=SOT, Reverse Breakdown Voltage=6V, Reverse Stand-off Voltage=5.5V, Configuration=Quad, Datasheet URL=https://datasheet.ciiva.com/4479/prtr5v0u2x-102853-4479461.pdf, Datasheet Version="Rev. 02, 01/2008", Direction Type=Uni-Directional, Leakage Current (Max)=0.1uA, Manufacturer URL=http://www.nxp.com/, Mounting=SurfaceMount, Mounting Style=SurfaceMount, Number of Elements=1, Package Type=SOT, Packaging=TapeandReel, Pin Count=3+Tab, Polarity=Uni-Directional, Product Depth (mm)=1.4mm, Product Height (mm)=1mm, Product Length (mm)=3mm, Rad Hardened=No, Suppressor Type=DiodeArrays, Working Voltage=5.5V, Working Voltage (Max)=5.5V
D2 D4: library part CMP-1674-00001-3, "LED RED CLEAR 0805 SMD", Manufacturer=Lite-On, PartNumber=LTST-C170CKT, ComponentLink1Description=Datasheet, ComponentLink1URL=http://media.digikey.com/pdf/Data%20Sheets/Lite-On%20PDFs/LTST-C170CKT.pdf, PackageReference=C170CKT
D3: library part CMP-1674-00002-4, "LED Uni-Color Green, 100 mW, 120 mA, -55 to 85 degC, 2-Pin SMD, RoHS, Tape and Reel", Colour=Green, Max Operating Temperature="85 degC", Min Operating Temperature="-55 degC", Package Quantity=1, DatasheetVersion=03/2003, Height="1.1 mm", Length="2 mm", Mount="Surface Mount", Mounting Technology="Surface Mount", PackageDescription="2-Pin Surface Mount Device, Body 2 x 1.25 mm", PackageReference=C170GKT, Packaging="Tape and Reel", Pins=2, RoHSCompliant=true
DS1 DS2: library part CMP-2000-05198-1, "Chip LED, Green, 574 nm, 40 pF, -55 to 85 degC, 2-Pin SMD, RoHS, Tape and Reel", Emitting Color=YellowGreen, Forward Current=30mA, Forward Voltage=2.4V, Manufacturer=Lite-On, Operating Temperature Classification=Industrial, Operating Temp Range=-55Cto85C, Package Type=ChipLed, Power Dissipation=75W, Reverse Voltage=5V, Test Current (It)=20mA, Chip Material=AlGaInP, Datasheet URL=http://download.siliconexpert.com/pdfs/2007/08/26/semi_b/manual/lot/ds/ltst-c191kgkt.pdf, Datasheet Version=Jan-07, DELETED=Compliant, Dominant Wave Length=571nm, High Brightness=Yes, Lens Dimensions=1.1X0.8X0.37mm, Luminous Intensity=35mcd, Lum Intensity=35mcd, Main Category=ChipLED, Manufacturer URL=http://www.us.liteon.com/, Mounting=SurfaceMount, Number of Elements=1, Packaging=TapeandReel, Peak Wavelength=574nm, Pin Count=2, Product Depth (mm)=0.8mm, Product Height (mm)=0.55mm, Product Length (mm)=1.6mm, Rad Hardened=No, Shape Type=Rectangular, Type=Uni-Color, Viewing Angle=130deg
FB1: library part CMP-0686-00176-3, "Chip Ferrite Bead for General Use, 10 Ohm, 1000 mA, -55 to 125 degC, 1 x 0.5 x 0.55 mm SMD, Tape and Reel", DC Resistance="0.025 Ohm Max.", Manufacturer=Murata, Operating Temperature Range="-55 to 125 degC", Rated Current="1000 mA", ComponentLink1Description="Manufacturer URL", ComponentLink1URL=http://www.murata.com/, ComponentLink2Description=Datasheet, ComponentLink2URL=http://www.murata.com/products/catalog/pdf/c31e.pdf, ComponentLink3Description="Package Specification", ComponentLink3URL=http://www.murata.com/products/catalog/pdf/c31e.pdf, DatasheetVersion=08/2013, Impedance (at 100 MHz)="10 Ohm Typ.", Mounting Technology="Surface Mount", PackageDescription="2-Pin Chip, Body 1 x 0.5 mm", PackageReference=BLM15-2, Packing="Tape and Reel", PartNumber=BLM15AG100SN1D
J1: library part CMP-0031-00001-1, "Connector; USBMicro-B,Reverse type, SMT; 5 Position; Right Angle", Operating Temperature="-30 to 85 degC", ComponentLink1Description="Manufacturer URL", ComponentLink1URL=http://www.hirose.com/‎, ComponentLink2Description=Datasheet, ComponentLink2URL=http://www.hirose.co.jp/cataloge_hp/e24200011.pdf, DatasheetVersion=08/2010, Mounting Technology="Surface Mount", PackageDescription="5-Pin USB Micro-B R/A Connector", PackageReference=ZX62R-B-5P, PartNumber=ZX62R-B-5P